# Allegro board Shield.brd
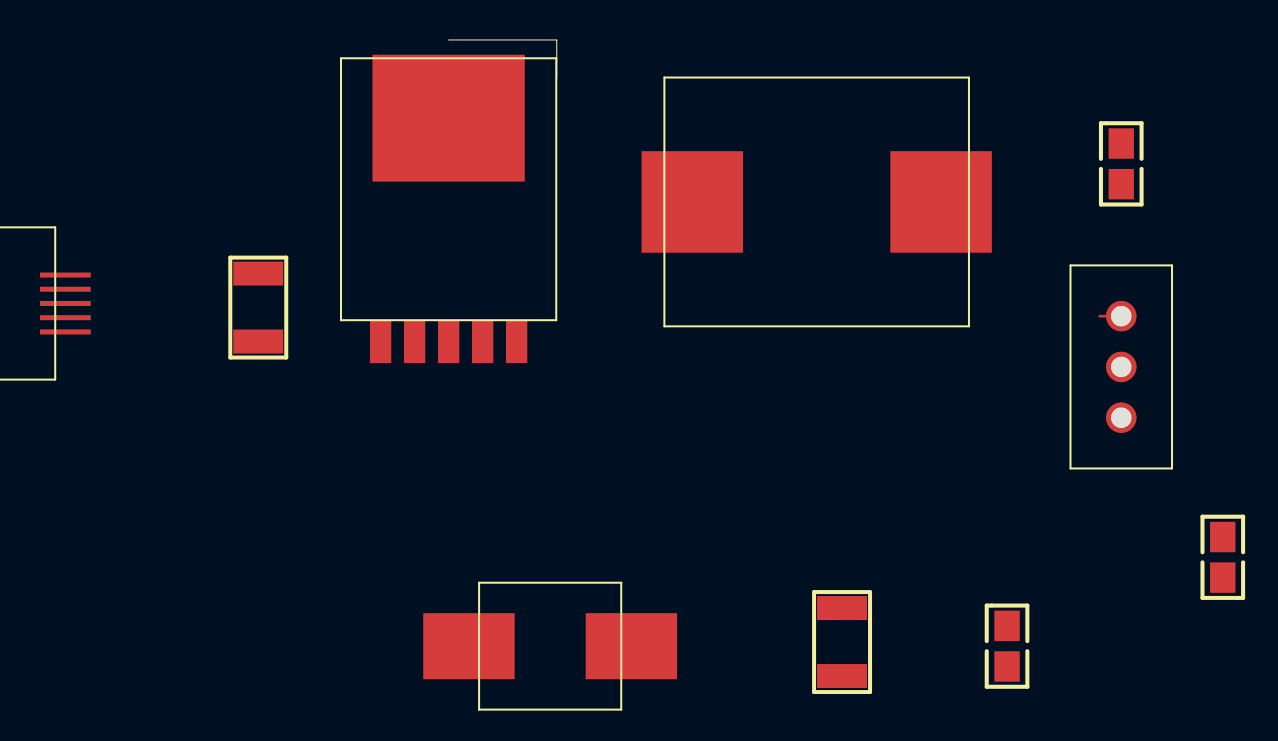
[diagram p0: board, top side]
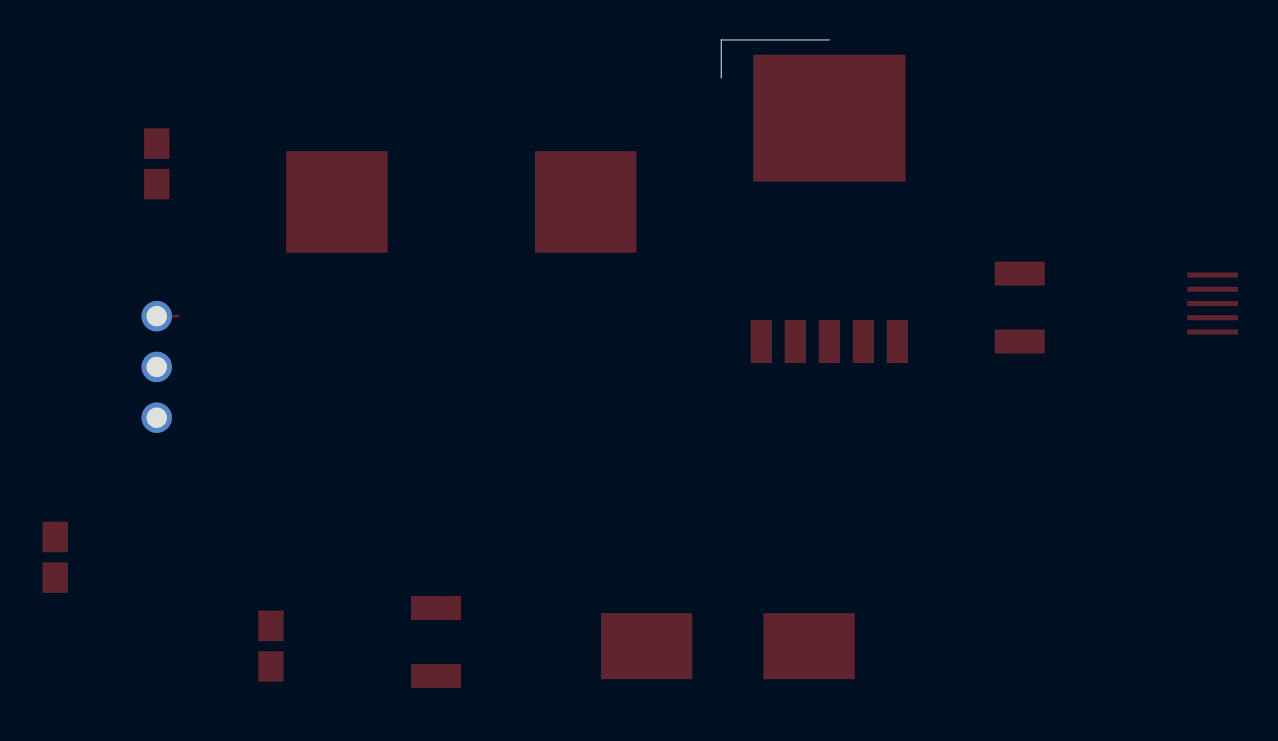
[diagram p1: board, bottom side, seen from below]

Outline 5.41 x 1.91 mm; copper layers: TOP, BOTTOM. Coordinates in mm from the lower left corner of the outline.

## Placement (name value [footprint] x y rotation side)
C3  10uF  [C0805]  38.74 -23.98 180 top
C7  10uF  [C0805]  33.66 -4.29 0 top
C8  100uF  [C1210]  -9.52 -13.18 90 top
C9  100uF  [C1210]  19.69 -26.52 270 top
D6  MBR360  [SS34]  5.08 -28.42 0 top
J9  HEADER 5  [MICROUSB]  -22.22 -11.28 180 top
L1  47uH  [RH127]  18.42 -6.2 0 top
R6  100k  [R3296W]  33.66 -14.45 180 top
R9  10K  [R0805]  27.94 -28.42 0 top
U13  LM2576HV-ADJ  [LM2576]  0 -5.56 270 top

## Library data of the parts
C3 C7 = CAP NP
C8 C9 = CAP POL
D6 = DIODE SCHOTTKY
J9 = HEADER 5
L1 = INDUCTOR
R6 = RESISTOR VAR
R9 = RESISTOR
U13 = LM2576HV-ADJ

## Footprints (pads in the part's own frame, mm; a bottom-side part is the same pattern mirrored in y, then rotated)
C0805
  rect 1.27x1.524 smd: 1(0,1.016) 2(0,-1.016)
C1210
  rect 1.2x2.5 smd: 1(0,0) 2(3.4,0)
LM2576
  rect 6.35x7.62 smd: (-3.556,0)
  rect 2.159x1.067 smd: 1(7.62,-3.404) 2(7.62,-1.702) 3(7.62,0) 4(7.62,1.702) 5(7.62,3.404)
MICROUSB
  rect 2.54x0.254 smd: 1(-3.048,1.422) 2(-3.048,0.711) 3(-3.048,0) 4(-3.048,-0.711) 5(-3.048,-1.422)
R0805
  rect 1.27x1.524 smd: 1(0,1.016) 2(0,-1.016)
R3296W
  round 1.524 hole 1.016: 1(0,2.54) 2(0,0) 3(0,-2.54)
RH127
  rect 5.08x5.08 smd: 1(-6.223,0) 2(6.223,0)
SS34
  rect 4.572x3.302 smd: 1(-4.064,0) 2(4.064,0)

## Nets
4.2V: C7.1 C9.1 L1.2 R6.3(B)
5V: C3.2 C8.1 J9.1 U13.1(VIN)
GND: C3.1 C7.2 C8.2 C9.2 D6.1(ANODE) J9.5 R9.2 U13.3(GND) U13.5(ON/OFF)
N13508: D6.2(CATHODE) L1.1 U13.2(OUTPUT)
N13949: R6.2(WIPER) U13.4(FEEDBACK)
N138620: R6.1(A) R9.1

Pads without a net: J9 2 3 4

## Routing (per net, layer and track width the routed paths; a pad name or vN(x,y) marks a point on that pad's centre or on a via; arc(x,y) is an arc through that point)
4.2V: length 1.1
  TOP w0.127: R6.3 32.58,-11.91
